# Altium PCB Flight_Controller.PcbDoc (part 2 of 4)
Units mil, origin at the board's own origin, x right, y up, seen from the top; angles counter-clockwise.
Board outline 2353.5 x 3084.1 mil, 4 copper layers (Top Layer, Layer 2, Layer 1, Bottom Layer), stack 62.48 mil thick; 95 components, 80 nets, 358 pads, 134 vias.
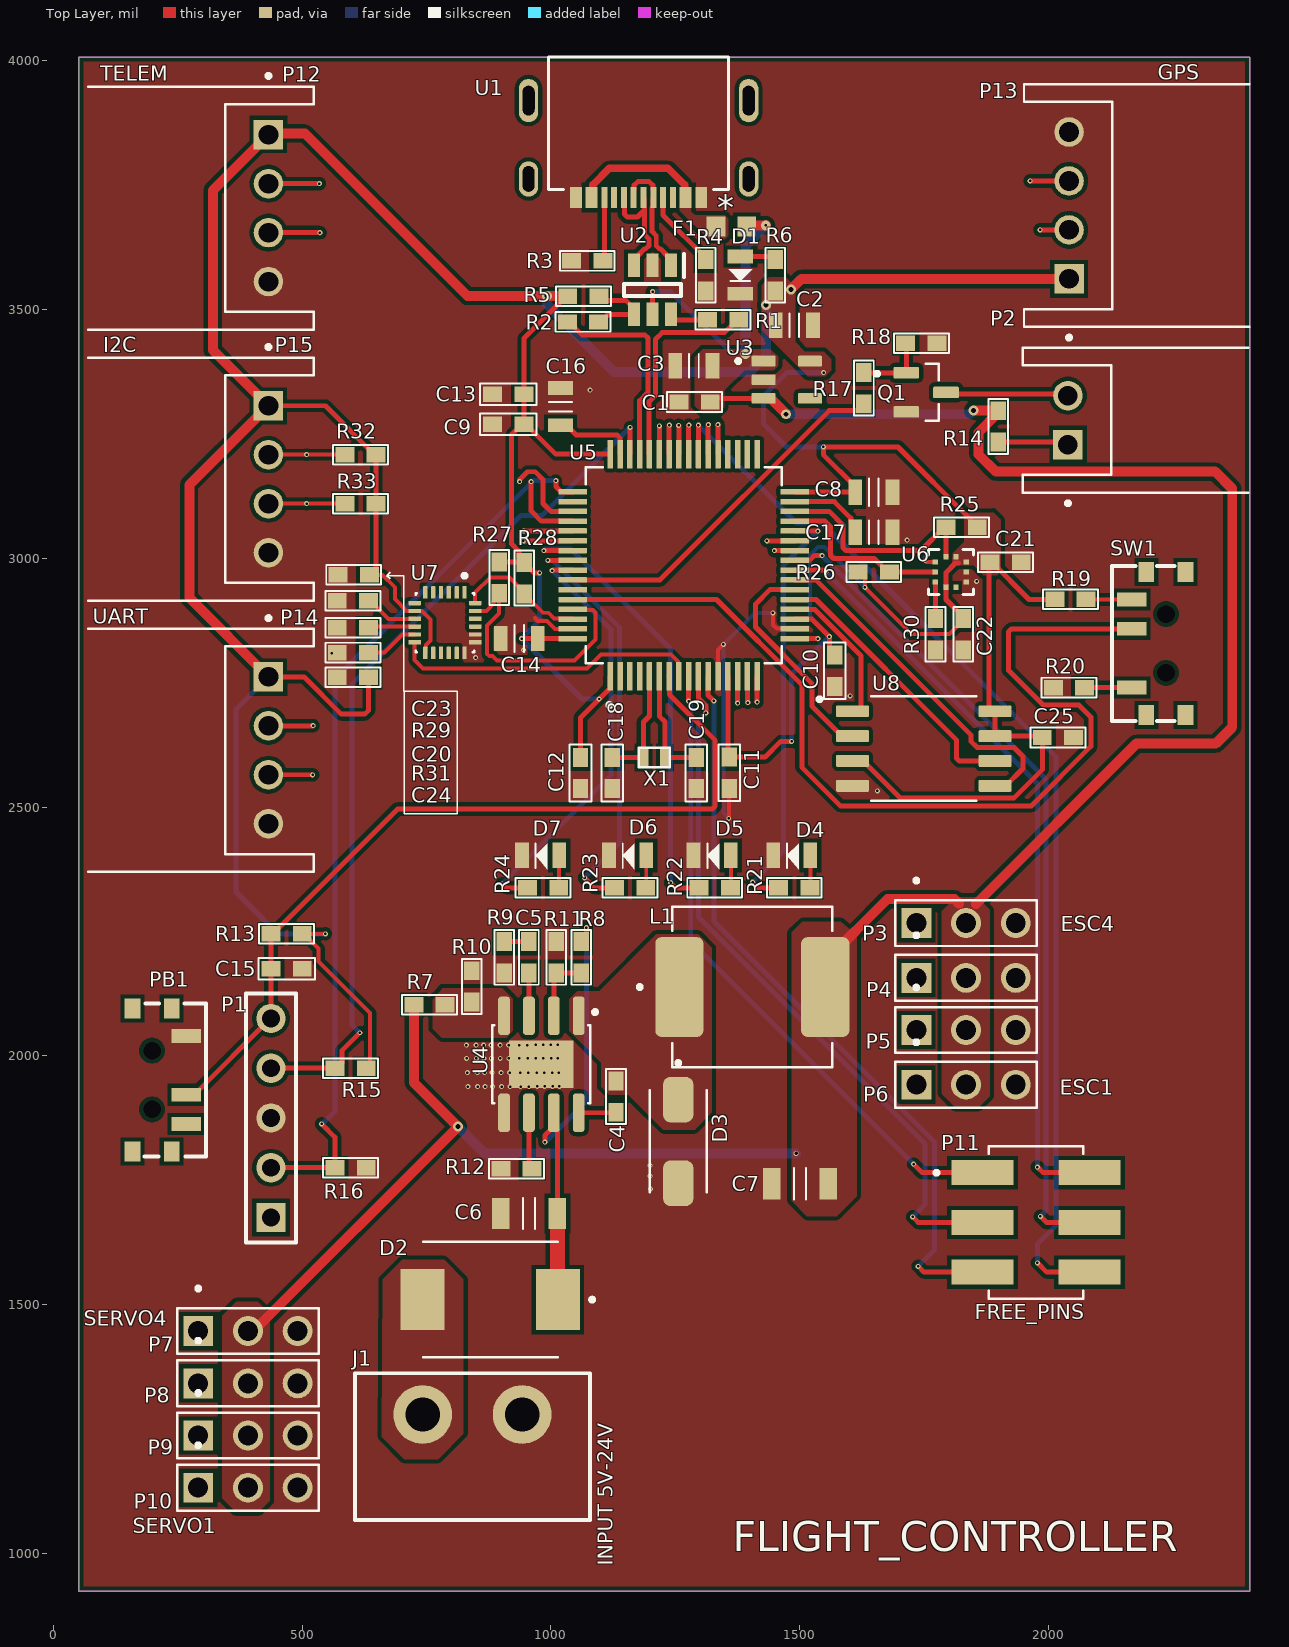
[diagram p0: Top Layer view]

## Part data (continued)
L1: "Inductor High Current Shielded Wirewound 15uH 20% 100KHz 4.9A 65.3mOhm DCR 3232 T/R", Case/Package=3232, Current Rating=4.9A, DC Resistance (DCR)=65.3mΩ, Manufacturer=Vishay, Manufacturer Part Number=IHLP3232DZER150M11, Max DC Current=3.7A, Max Operating Temperature=125°C, Min Operating Temperature=-55°C, Self Resonant Frequency=10.3MHz, Test Frequency=100kHz, Tolerance=20%, Inductance=15µH, Category="Fixed Inductors", China RoHS=Compliant, ComponentLink1Description=https://datasheet.octopart.com:443/IHLP3232DZER150M11-Vishay-datasheet-181468578.pdf?src-supplier=IHS, ComponentLink1URL=https://datasheet.octopart.com:443/IHLP3232DZER150M11-Vishay-datasheet-181468578.pdf?src-supplier=IHS, ComponentLink2Description=https://datasheet.octopart.com:443/IHLP3232DZER150M11-Vishay-datasheet-193387366.pdf?src-supplier=JRH+Electronics, ComponentLink2URL=https://datasheet.octopart.com:443/IHLP3232DZER150M11-Vishay-datasheet-193387366.pdf?src-supplier=JRH+Electronics, ComponentLink3Description=https://datasheet.octopart.com/IHLP3232DZER150M11-Vishay-datasheet-13133375.pdf, ComponentLink3URL=https://datasheet.octopart.com/IHLP3232DZER150M11-Vishay-datasheet-13133375.pdf, ComponentLink4Description=https://datasheet.octopart.com/IHLP3232DZER150M11-Vishay-datasheet-10981368.pdf, ComponentLink4URL=https://datasheet.octopart.com/IHLP3232DZER150M11-Vishay-datasheet-10981368.pdf, ComponentLink5Description=https://datasheet.octopart.com/IHLP3232DZER150M11-Vishay-datasheet-10855091.pdf, ComponentLink5URL=https://datasheet.octopart.com/IHLP3232DZER150M11-Vishay-datasheet-10855091.pdf, ComponentLink6Description=https://datasheet.octopart.com/IHLP3232DZER150M11-Vishay-datasheet-10854409.pdf, ComponentLink6URL=https://datasheet.octopart.com/IHLP3232DZER150M11-Vishay-datasheet-10854409.pdf, ComponentLink7Description=https://datasheet.octopart.com/IHLP3232DZER150M11-Vishay-datasheet-10673122.pdf, ComponentLink7URL=https://datasheet.octopart.com/IHLP3232DZER150M11-Vishay-datasheet-10673122.pdf, ComponentLink8Description=https://datasheet.octopart.com/IHLP3232DZER150M11-Vishay-datasheet-10546874.pdf, ComponentLink8URL=https://datasheet.octopart.com/IHLP3232DZER150M11-Vishay-datasheet-10546874.pdf, ComponentLink9Description=https://datasheet.octopart.com/IHLP3232DZER150M11-Vishay-datasheet-10406895.pdf, ComponentLink9URL=https://datasheet.octopart.com/IHLP3232DZER150M11-Vishay-datasheet-10406895.pdf, ComponentLink10Description=https://datasheet.octopart.com/IHLP3232DZER150M11-Vishay-datasheet-10293436.pdf, ComponentLink10URL=https://datasheet.octopart.com/IHLP3232DZER150M11-Vishay-datasheet-10293436.pdf, ComponentLink11Description=https://datasheet.octopart.com/IHLP3232DZER150M11-Vishay-datasheet-10187444.pdf, ComponentLink11URL=https://datasheet.octopart.com/IHLP3232DZER150M11-Vishay-datasheet-10187444.pdf, ComponentLink12Description=https://datasheet.octopart.com:443/IHLP3232DZER150M11-Vishay-datasheet-67039454.pdf?src-supplier=Farnell, ComponentLink12URL=https://datasheet.octopart.com:443/IHLP3232DZER150M11-Vishay-datasheet-67039454.pdf?src-supplier=Farnell, ComponentLink13Description=https://datasheet.octopart.com:443/IHLP3232DZER150M11-Vishay-datasheet-41195472.pdf?src-supplier=Newark, ComponentLink13URL=https://datasheet.octopart.com:443/IHLP3232DZER150M11-Vishay-datasheet-41195472.pdf?src-supplier=Newark, ComponentLink14Description=https://datasheet.octopart.com:443/IHLP3232DZER150M11-Vishay-datasheet-62320561.pdf?src-supplier=element14+APAC, ComponentLink14URL=https://datasheet.octopart.com:443/IHLP3232DZER150M11-Vishay-datasheet-62320561.pdf?src-supplier=element14+APAC, ComponentLink15Description=https://datasheet.octopart.com:443/IHLP3232DZER150M11-Vishay-Dale-datasheet-41169530.pdf?src-supplier=element14+APAC, ComponentLink15URL=https://datasheet.octopart.com:443/IHLP3232DZER150M11-Vishay-Dale-datasheet-41169530.pdf?src-supplier=element14+APAC, ComponentLink16Description=https://datasheet.octopart.com:443/IHLP3232DZER150M11-Vishay-datasheet-17023530.pdf?src-supplier=Factory+Futures, ComponentLink16URL=https://datasheet.octopart.com:443/IHLP3232DZER150M11-Vishay-datasheet-17023530.pdf?src-supplier=Factory+Futures, ComponentLink17Description=http://sigma.octopart.com:80/rohs_statement/Vishay-company-15.pdf?src-supplier=Compliance+Statements, ComponentLink17URL=http://sigma.octopart.com:80/rohs_statement/Vishay-company-15.pdf?src-supplier=Compliance+Statements, Composition=Wirewound, Contact Plating=Tin, Core Material=Composite, Depth=8.26mm, Height=4mm, Height - Seated (Max)=3.9878mm, Lead Free="Lead Free", Length=8.18mm, Lifecycle Status=Production, Max Current Rating=4.9A, Military Standard=Not, Mount="Surface Mount", Number of Circuits=1, Number of Pins=2, Number of Terminals=2, Pricing 1="1=1,08, 10=0,926, 50=0,808, 100=0,767, 200=0,728, 500=0,684 (EUR)", Radiation Hardening=No, REACH SVHC=Yes, Resistance=65.3mΩ, RMS Current (Irms)=4.9A, RoHS=Compliant, Saturation Current=3.7A, Schedule B="8504500000, 8504500000|8504500000|8504500000|8504500000|8504500000", Series Resistance=65.3mΩ, Shielding=Shielded, Stock 1=705, Supplier 1=Farnell, Supplier Part Number 1=IHLP3232DZER150M11, Termination=SMD/SMT, Width=8.18mm, Inductance Tolerance=20%
P1: "Header, 5-Pin", LatestRevisionDate=17-Jul-2002, LatestRevisionNote="Re-released for DXP Platform.", Publisher="Altium Limited"
P3 P4 P5 P6 P7 P8 P9 P10: "CONN HEADER VERT 3POS 2.54MM / Connector Header Through Hole 3 position 0.100\" (2.54mm)", Color=Black, Contact Current Rating=3A, Flammability Rating="UL94 V-0", High Temperature Housing=Yes, Manufacturer="TE Connectivity", Manufacturer Lifecycle Status=ACTIVE, Manufacturer Part Number=5-146281-3, Max Operating Temperature=105°C, Min Operating Temperature=-65°C, Ratings=CSA, Insulation Resistance=5GΩ, Approvals=CSA, Category="Headers and Wire Housings", China RoHS=Compliant, ComponentLink1Description=https://datasheet.octopart.com:443/5-146281-3-TE-Connectivity-datasheet-180097156.pdf?src-supplier=JRH+Electronics, ComponentLink1URL=https://datasheet.octopart.com:443/5-146281-3-TE-Connectivity-datasheet-180097156.pdf?src-supplier=JRH+Electronics, ComponentLink2Description=https://datasheet.octopart.com:443/5-146281-3-TE-Connectivity-datasheet-181434920.pdf?src-supplier=JRH+Electronics, ComponentLink2URL=https://datasheet.octopart.com:443/5-146281-3-TE-Connectivity-datasheet-181434920.pdf?src-supplier=JRH+Electronics, ComponentLink3Description=https://datasheet.octopart.com:443/5-146281-3-TE-Connectivity-datasheet-11894384.pdf?src-supplier=Electro+Sonic, ComponentLink3URL=https://datasheet.octopart.com:443/5-146281-3-TE-Connectivity-datasheet-11894384.pdf?src-supplier=Electro+Sonic, ComponentLink4Description=https://sigma.octopart.com:443/136685837/technical_drawing/TE-Connectivity-5-146281-3.pdf?src-supplier=Sager+Electronics, ComponentLink4URL=https://sigma.octopart.com:443/136685837/technical_drawing/TE-Connectivity-5-146281-3.pdf?src-supplier=Sager+Electronics, ComponentLink5Description=https://sigma.octopart.com:443/77883388/technical_drawing/TE-Connectivity-5-146281-3.pdf?src-supplier=TE+Connectivity, ComponentLink5URL=https://sigma.octopart.com:443/77883388/technical_drawing/TE-Connectivity-5-146281-3.pdf?src-supplier=TE+Connectivity, ComponentLink6Description=https://datasheet.octopart.com:443/5-146281-3-AMP-datasheet-176948369.pdf?src-supplier=Burklin+Elektronik, ComponentLink6URL=https://datasheet.octopart.com:443/5-146281-3-AMP-datasheet-176948369.pdf?src-supplier=Burklin+Elektronik, ComponentLink7Description=https://datasheet.octopart.com:443/5-146281-3-TE-Connectivity-datasheet-62113853.pdf?src-supplier=RS+(Formerly+Allied+Electronics), ComponentLink7URL=https://datasheet.octopart.com:443/5-146281-3-TE-Connectivity-datasheet-62113853.pdf?src-supplier=RS+(Formerly+Allied+Electronics), ComponentLink8Description=https://datasheet.octopart.com:443/5-146281-3-TE-Connectivity-datasheet-20738154.pdf?src-supplier=RS+(Formerly+Allied+Electronics), ComponentLink8URL=https://datasheet.octopart.com:443/5-146281-3-TE-Connectivity-datasheet-20738154.pdf?src-supplier=RS+(Formerly+Allied+Electronics), ComponentLink9Description=https://datasheet.octopart.com:443/5-146281-3-Tyco-Electronics-datasheet-9871387.pdf?src-supplier=RS+(Formerly+Allied+Electronics), ComponentLink9URL=https://datasheet.octopart.com:443/5-146281-3-Tyco-Electronics-datasheet-9871387.pdf?src-supplier=RS+(Formerly+Allied+Electronics), ComponentLink10Description=http://sigma.octopart.com:80/38847167/materials_sheet/TE-Connectivity-5-146281-3.pdf?src-supplier=Compliance+Statements, ComponentLink10URL=http://sigma.octopart.com:80/38847167/materials_sheet/TE-Connectivity-5-146281-3.pdf?src-supplier=Compliance+Statements, ComponentLink11Description=http://sigma.octopart.com:80/78323269/materials_sheet/TE-Connectivity-5-146281-3.pdf?src-supplier=Compliance+Statements, ComponentLink11URL=http://sigma.octopart.com:80/78323269/materials_sheet/TE-Connectivity-5-146281-3.pdf?src-supplier=Compliance+Statements, ComponentLink12Description=http://sigma.octopart.com:80/136743184/materials_sheet/TE-Connectivity-5-146281-3.pdf?src-supplier=Compliance+Statements, ComponentLink12URL=http://sigma.octopart.com:80/136743184/materials_sheet/TE-Connectivity-5-146281-3.pdf?src-supplier=Compliance+Statements, ComponentLink13Description=http://sigma.octopart.com:80/14915290/rohs_certificate/Agastat-5-146281-3.pdf?src-supplier=Compliance+Statements, ComponentLink13URL=http://sigma.octopart.com:80/14915290/rohs_certificate/Agastat-5-146281-3.pdf?src-supplier=Compliance+Statements, Connector Type="Header, Pin, Plug", Contact Gender=Male, Contact Mating Length=5.842mm, Contact Plating=Gold, Contact Shape=Square, Contact Style=Pin, Current Rating=3A, Depth=2.34mm, ELV=Compliant, Export Control Classification Number (ECCN) Code=EAR99, Gender=Male, Harmonized Tariff Schedule (HTS) Code=8536.69.40.40, High Speed Serial Data Connector=No, Housing Color=Black, Housing Material=Polymer, Keyed=No, Lead Free="Lead Free", Lead Length=3.048mm, Length=7.21mm, Lifecycle Status=Production, Mating Post Length=5.842mm, Mount="Through Hole", Number of Contacts=3, Number of Pins=3, Number of Ports=1, Number of Positions=3, Number of Rows=1, Orientation=Vertical, Packaging=Carton, PCB Mounting Orientation=Vertical, PCB Thickness=1.6002mm, Pitch=2.54mm, Plating Thickness=762nm, Pricing 1="10=0,602, 50=0,55, 100=0,462, 250=0,419 (EUR)", Radiation Hardening=No, REACH SVHC=Yes, RoHS=Compliant, Row Spacing=2.54mm, Shielding=Unshielded, Stock 1=263, Supplier 1=Farnell, Supplier Part Number 1=5-146281-3, Terminal Pitch=2.54mm, Termination=Solder, Insulation Color=Black, Introduction Date=2005-06-13
P11: "6pin 2.54mm 2 2.54mm Header，Push-Pull 3A 2.54μm tin SMD mount 7.78mm(Length)*7.37mm(height)", Current Rating=3A, Dielectric Material=Polyethylene, Manufacturer="Amphenol Communications Solutions", Manufacturer Part Number=10125394-T0803ALF, Max Operating Temperature=125°C, Min Operating Temperature=-65°C, Supplier Part Number 1=649-10125394T0803ALF, Insulation Color=Black, Insulation Resistance=5GΩ, Category="Card Edge Connectors", ComponentLink1Description=https://datasheet.octopart.com:443/10125394-T0803ALF-Amphenol-Communications-Solutions-datasheet-182239538.pdf?src-supplier=IHS, ComponentLink1URL=https://datasheet.octopart.com:443/10125394-T0803ALF-Amphenol-Communications-Solutions-datasheet-182239538.pdf?src-supplier=IHS, Gender=Male, Lifecycle Status=Production, Number of Positions=6, Number of Rows=2, Orientation=Straight, Pitch=2.54mm, Plating Thickness=2.54µm, Pricing 1="1=0,55, 10=0,47, 50=0,47, 100=0,383, 1000=0,325, 10000=0,305 (USD)", REACH SVHC=Yes, RoHS=Compliant, Row Spacing=5.46mm, Stock 1=1906, Supplier 1=Mouser, Terminal Pitch=2.54mm
P12 P13 P14 P15: "Header, Right Angle, 4Way;", Contact Resistance=20mΩ, Current Rating=3A, Housing Color=White, Manufacturer=JST, Manufacturer Part Number=S4B-XH-A(LF)(SN), Max Operating Temperature=85°C, Max Voltage Rating (AC)=250V, Min Operating Temperature=-25°C, Ratings=TUV, Supplier Part Number 1="S4B-XH-A (LF)(SN)", Insulation Resistance=1GΩ, Category="Headers and Wire Housings", China RoHS=Compliant, ComponentLink1Description=https://datasheet.octopart.com:443/S4B-XH-A%28LF%29%28SN%29-JST-datasheet-12510042.pdf?src-supplier=Upverter, ComponentLink1URL=https://datasheet.octopart.com:443/S4B-XH-A%28LF%29%28SN%29-JST-datasheet-12510042.pdf?src-supplier=Upverter, ComponentLink2Description=https://datasheet.octopart.com:443/S4B-XH-A%28LF%29%28SN%29-JST-datasheet-8325564.pdf?src-supplier=Burklin+Elektronik, ComponentLink2URL=https://datasheet.octopart.com:443/S4B-XH-A%28LF%29%28SN%29-JST-datasheet-8325564.pdf?src-supplier=Burklin+Elektronik, ComponentLink3Description=https://datasheet.octopart.com:443/S4B-XH-A%28LF%29%28SN%29-JST-datasheet-138896056.pdf?src-supplier=IHS, ComponentLink3URL=https://datasheet.octopart.com:443/S4B-XH-A%28LF%29%28SN%29-JST-datasheet-138896056.pdf?src-supplier=IHS, ComponentLink4Description=https://datasheet.octopart.com:443/S4B-XH-A-%28LF%29%28SN%29-JST-datasheet-62336360.pdf?src-supplier=element14+APAC, ComponentLink4URL=https://datasheet.octopart.com:443/S4B-XH-A-%28LF%29%28SN%29-JST-datasheet-62336360.pdf?src-supplier=element14+APAC, ComponentLink5Description=https://datasheet.octopart.com:443/S4B-XH-A-%28LF%29%28SN%29-JST-datasheet-63094.pdf?src-supplier=element14+APAC, ComponentLink5URL=https://datasheet.octopart.com:443/S4B-XH-A-%28LF%29%28SN%29-JST-datasheet-63094.pdf?src-supplier=element14+APAC, ComponentLink6Description=https://datasheet.octopart.com:443/S4B-XH-A%28LF%29%28SN%29-JST-datasheet-140264791.pdf?src-supplier=LKR, ComponentLink6URL=https://datasheet.octopart.com:443/S4B-XH-A%28LF%29%28SN%29-JST-datasheet-140264791.pdf?src-supplier=LKR, Connector Type="Male Pin", Contact Material=Brass, Contact Plating=Tin, Country of Origin=Japan, Depth=11.5mm, Export Control Classification Number (ECCN) Code=EAR99, Gender=Male, Harmonized Tariff Schedule (HTS) Code=8536.69.40.40, Height=6.1mm, Housing Material=Polyamide, Lead Free="Lead Free", Lead Pitch=2.5mm, Length=12.4mm, Lifecycle Status=Production, Max Current Rating=3A, Mount="Through Hole", Number of Contacts=4, Number of Pins=4, Number of Poles=4, Number of Positions=4, Number of Rows=1, Orientation="Right Angle", Pitch=2.4892mm, Pricing 1="100=0,172, 500=0,149, 1000=0,142, 2500=0,139 (EUR)", REACH SVHC=No, RoHS=Compliant, Stock 1=59807, Supplier 1=Farnell, Terminal Pitch=2.5mm, Termination=Solder, Voltage Rating=250V, Voltage Rating (AC)=250V, Weight=28.349523g, Width=11.5mm, Wire/Cable Gauge=22AWG, Insulation Color=White, Introduction Date=2005-10-20
PB1: "Slide Switch, SPDT, 0.025A, 24V, SMD", Manufacturer=E-Switch, Max Operating Temperature=70°C, Min Operating Temperature=-20°C, Operating Force=150gf, Supplier Part Number 1=EG5720CT-ND, Voltage Rating (DC)=24V, Actuator Length=1.4mm, Actuator Type=Standard, ComponentLink1Description=https://media.digikey.com/pdf/Data%20Sheets/E-Switch%20PDFs/EG1215_Series_Ds.pdf?src-supplier=Digikey, ComponentLink1URL=https://media.digikey.com/pdf/Data%20Sheets/E-Switch%20PDFs/EG1215_Series_Ds.pdf?src-supplier=Digikey, ComponentLink2Description=http://www.farnell.com/datasheets/2645007.pdf?src-supplier=Farnell, ComponentLink2URL=http://www.farnell.com/datasheets/2645007.pdf?src-supplier=Farnell, Electrical Life=10000Cycles, Manufacturer Part Number=EG1215AA, Mechanical Life=10000Cycles, Mount="Surface Mount", Packaging="Cut Tape", Pricing 1="1=0,99, 10=0,951, 25=0,8884, 100=0,7715, 250=0,702, 500=0,6508, 1000=0,60327 (USD)", RoHS=Yes, RoHS Compliant=Yes, Series=EG, Stock 1=15837, Supplier 1=Digikey, Switch Function=On-On, Switch Travel=1.5mm, Termination="Gull Wing", Throw Configuration=SPDT
R1 R2 R3 R4 R13 R15 R16 R19 R20 R25 R26 R27 R28 R29 R30 R31 R32 R33: library part "RES 10K OHM 0603", "RES 10K %1 OHM 0603 SMD", Case Code (Metric)=1608, Case Code (Imperial)=0603, Manufacturer=Yageo, Max Operating Temperature=155°C, Max Power Dissipation=100mW, Min Operating Temperature=-55°C, Resistance=10kR, Resistance Tolerance=1%, Resistor Type="Thick Film", Supplier Part Number 1=311-10.0KHRCT-ND, Temperature Coefficient=100ppm/°C, Voltage Rating=75V, Voltage Rating (DC)=50V, Case/Package=0603, Category="Chip SMD Resistors", ComponentLink1Description=https://datasheet.ciiva.com/7660/38590-7660789.pdf?src-supplier=Element14, ComponentLink1URL=https://datasheet.ciiva.com/7660/38590-7660789.pdf?src-supplier=Element14, ComponentLink2Description=https://datasheet.ciiva.com/15189/getdatasheetpartid-409289-15189591.pdf?src-supplier=Verical, ComponentLink2URL=https://datasheet.ciiva.com/15189/getdatasheetpartid-409289-15189591.pdf?src-supplier=Verical, ComponentLink3Description=https://datasheet.ciiva.com/46440/1868787-46440891.pdf?src-supplier=Element14, ComponentLink3URL=https://datasheet.ciiva.com/46440/1868787-46440891.pdf?src-supplier=Element14, ComponentLink4Description=https://datasheet.ciiva.com/7983/443971-7983596.pdf?src-supplier=Element14, ComponentLink4URL=https://datasheet.ciiva.com/7983/443971-7983596.pdf?src-supplier=Element14, ComponentLink5Description=https://datasheet.ciiva.com/7746/1738695-7746239.pdf?src-supplier=Element14, ComponentLink5URL=https://datasheet.ciiva.com/7746/1738695-7746239.pdf?src-supplier=Element14, ComponentLink6Description=https://datasheet.ciiva.com/22747/443971-22747519.pdf?src-supplier=Element14, ComponentLink6URL=https://datasheet.ciiva.com/22747/443971-22747519.pdf?src-supplier=Element14, Construction=Rectangular, Depth=0.8mm, Designed by=BERK, Features="Moisture Resistant", Height=0.45mm, Lead Free="Lead Free", Lead Pitch=0.3mm, Length=1.6mm, Manufacturer Part Number=RC0603FR-0710KL, Military Standard=Not, Number of Pins=2, Number of Terminations=2, Packaging="Tape and Reel", Power Rating=100mW, Pricing 1="1=0,10000, 10=0,02300, 100=0,00930, 1000=0,00417, 2500=0,00362 (USD)", REACH SVHC=Unknown, RoHS=Yes, RoHS Compliant=Yes, Series=RC, Size Code=0603, Stock 1=24140601, Supplier 1=Digi-Key, Termination=SMD/SMT, Tolerance=1%, Weight=7.1E-05oz, Width=0.8mm
R5 R6 R21 R22 R23 R24: library part "RES 1K OHM 0603", "RES 1K %1 OHM 0603 SMD", Case Code (Metric)=1608, Case Code (Imperial)=0603, Manufacturer=Yageo, Manufacturer Part Number=RC0603JR-071KL, Max Operating Temperature=155°C, Min Operating Temperature=-55°C, Package Quantity=5000, Power Rating=100mW, Resistance=1kR, Resistance Tolerance=5%, Resistor Type="Thick Film", Supplier Part Number 1=311-1.0KGRCT-ND, Temperature Coefficient=100ppm/°C, Voltage Rating=50V, Body Length=1.6mm, Case/Package=0603, Category="Chip SMD Resistors", ComponentLink1Description=https://datasheet.ciiva.com/8883/pyu-rc0603-51-rohs-l-4-8883051.pdf?src-supplier=Avnet, ComponentLink1URL=https://datasheet.ciiva.com/8883/pyu-rc0603-51-rohs-l-4-8883051.pdf?src-supplier=Avnet, ComponentLink2Description=https://datasheet.ciiva.com/7746/443971-7746461.pdf?src-supplier=Element14, ComponentLink2URL=https://datasheet.ciiva.com/7746/443971-7746461.pdf?src-supplier=Element14, ComponentLink3Description=https://datasheet.ciiva.com/22747/443971-22747533.pdf?src-supplier=Element14, ComponentLink3URL=https://datasheet.ciiva.com/22747/443971-22747533.pdf?src-supplier=Element14, ComponentLink4Description=https://datasheet.ciiva.com/7746/443971-7746462.pdf?src-supplier=Element14, ComponentLink4URL=https://datasheet.ciiva.com/7746/443971-7746462.pdf?src-supplier=Element14, Construction=Rectangular, Contact Plating=Tin,Matte, Depth=0.8mm, Designed by=BERK, Height=0.45mm, Lead Free="Lead Free", Length=1.6mm, Military Standard=Not, Number of Pins=2, Packaging="Tape and Reel", Pricing 1="1=0,10000, 10=0,01900, 100=0,00770, 1000=0,00344, 2500=0,00298 (USD)", Radiation Hardening=No, REACH SVHC=Unknown, RoHS=Yes, RoHS Compliant=Yes, Series=RC, Size Code=0603, Stock 1=5112056, Supplier 1=Digi-Key, Termination=SMD/SMT, Tolerance=5%, Voltage Rating (DC)=50V, Width=0.8mm
R7 R8 R9 R10 R12: library part "RES 220K OHM 0603", "RES 220K %5 OHM 0603 SMD", Case Code (Metric)=1608, Case Code (Imperial)=0603, Manufacturer=Yageo, Max Operating Temperature=155°C, Max Power Dissipation=100mW, Min Operating Temperature=-55°C, Package Quantity=1, Resistance=220kR, Resistance Tolerance=5%, Resistor Type="Thick Film", Supplier Part Number 1=311-220KGRCT-ND, Temperature Coefficient=100ppm/°C, Voltage Rating=50V, Case/Package=0603, Category="Chip SMD Resistors", ComponentLink1Description=https://datasheet.ciiva.com/2452/pyu-r-int-thick-7-2452923.pdf?src-supplier=Digi-Key, ComponentLink1URL=https://datasheet.ciiva.com/2452/pyu-r-int-thick-7-2452923.pdf?src-supplier=Digi-Key, ComponentLink2Description=https://datasheet.ciiva.com/2452/pyu-r-int-thick-7-2452924.pdf?src-supplier=Digi-Key, ComponentLink2URL=https://datasheet.ciiva.com/2452/pyu-r-int-thick-7-2452924.pdf?src-supplier=Digi-Key, ComponentLink3Description=https://datasheet.ciiva.com/2452/pyu-r-int-thick-7-2452925.pdf?src-supplier=Digi-Key, ComponentLink3URL=https://datasheet.ciiva.com/2452/pyu-r-int-thick-7-2452925.pdf?src-supplier=Digi-Key, Construction=Rectangular, Deisgned by=BERK, Depth=0.8mm, Features="Moisture Resistant", Height=0.022inch, Lead Free="Lead Free", Length=1.6mm, Manufacturer Part Number=RC0603JR-07220KL, Military Standard=Not, Number of Pins=2, Number of Terminations=2, Packaging="Tape and Reel", Power Rating=100mW, Pricing 1="1=0,10000, 10=0,01900, 100=0,00770, 1000=0,00344, 2500=0,00298 (USD)", REACH SVHC="No SVHC", RoHS=Yes, RoHS Compliant=Yes, Series=RC, Size Code=0603, Stock 1=558053, Supplier 1=Digi-Key, Termination=SMD/SMT, Tolerance=5%, Voltage Rating (DC)=50V, Width=0.031inch
R11: library part "RES 43K OHM 0603", "RES 43K %5 OHM 0603 SMD", Case Code (Metric)=1608, Case Code (Imperial)=0603, Manufacturer=Yageo, Max Operating Temperature=155°C, Max Power Dissipation=100mW, Min Operating Temperature=-55°C, Package Quantity=1, Resistance=43kR, Resistor Type="Thick Film", Supplier Part Number 1=311-43KGRCT-ND, Temperature Coefficient=100ppm/°C, Tolerance=5%, Voltage Rating=75V, Voltage Rating (DC)=50V, Case/Package=0603, Category="Chip SMD Resistors", ComponentLink1Description=https://datasheet.ciiva.com/2453/pyu-r-int-thick-7-2453052.pdf?src-supplier=Digi-Key, ComponentLink1URL=https://datasheet.ciiva.com/2453/pyu-r-int-thick-7-2453052.pdf?src-supplier=Digi-Key, ComponentLink2Description=https://datasheet.ciiva.com/2453/pyu-r-int-thick-7-2453053.pdf?src-supplier=Digi-Key, ComponentLink2URL=https://datasheet.ciiva.com/2453/pyu-r-int-thick-7-2453053.pdf?src-supplier=Digi-Key, ComponentLink3Description=https://datasheet.ciiva.com/2453/pyu-r-int-thick-7-2453054.pdf?src-supplier=Digi-Key, ComponentLink3URL=https://datasheet.ciiva.com/2453/pyu-r-int-thick-7-2453054.pdf?src-supplier=Digi-Key, Construction=Rectangular, Depth=0.8mm, Designed by=BERK, Features="Moisture Resistant", Height=0.022inch, Lead Free="Lead Free", Length=1.6mm, Manufacturer Part Number=RC0603JR-0743KL, Military Standard=Not, Number of Terminations=2, Packaging="Tape and Reel", Power Rating=100mW, Pricing 1="1=0,10000, 10=0,01900, 100=0,00770, 1000=0,00344, 2500=0,00298 (USD)", RoHS=Yes, RoHS Compliant=Yes, Series=RC, Stock 1=127716, Supplier 1=Digi-Key, Technology="THICK FILM", Termination=SMD/SMT, Weight=7.1E-05oz, Width=0.8mm, Working Voltage=75V
R14: library part "RES 15 OHM 0603", "RES 15 %5 OHM 0603 SMD", Case Code (Metric)=1608, Case Code (Imperial)=0603, Manufacturer=Yageo, Max Operating Temperature=155°C, Max Power Dissipation=100mW, Min Operating Temperature=-55°C, Package Quantity=1, Resistance=33R, Resistance Tolerance=5%, Resistor Type="Thick Film", Supplier Part Number 1=311-15GRCT-ND, Temperature Coefficient=100ppm/°C, Voltage Rating=75V, Voltage Rating (DC)=50V, Case/Package=0603, Category="Chip SMD Resistors", ComponentLink1Description=https://datasheet.ciiva.com/2453/pyu-r-int-thick-7-2453085.pdf?src-supplier=Digi-Key, ComponentLink1URL=https://datasheet.ciiva.com/2453/pyu-r-int-thick-7-2453085.pdf?src-supplier=Digi-Key, ComponentLink2Description=https://datasheet.ciiva.com/7746/443971-7746445.pdf?src-supplier=Element14, ComponentLink2URL=https://datasheet.ciiva.com/7746/443971-7746445.pdf?src-supplier=Element14, ComponentLink3Description=https://datasheet.ciiva.com/2453/pyu-r-int-thick-7-2453086.pdf?src-supplier=Digi-Key, ComponentLink3URL=https://datasheet.ciiva.com/2453/pyu-r-int-thick-7-2453086.pdf?src-supplier=Digi-Key, ComponentLink4Description=https://datasheet.ciiva.com/7746/443971-7746446.pdf?src-supplier=Element14, ComponentLink4URL=https://datasheet.ciiva.com/7746/443971-7746446.pdf?src-supplier=Element14, ComponentLink5Description=https://datasheet.ciiva.com/2453/pyu-r-int-thick-7-2453087.pdf?src-supplier=Digi-Key, ComponentLink5URL=https://datasheet.ciiva.com/2453/pyu-r-int-thick-7-2453087.pdf?src-supplier=Digi-Key, Construction=Rectangular, Depth=0.8mm, Designed by=BERK, Features="Moisture Resistant", Height=0.022inch, Lead Free="Lead Free", Length=1.6mm, Manufacturer Part Number=RC0603JR-0715RL, Military Standard=Not, Number of Pins=2, Number of Terminations=2, Packaging="Tape and Reel", Power Rating=100mW, Pricing 1="1=0,10000, 10=0,01900, 100=0,00770, 1000=0,00344, 2500=0,00298 (USD)", REACH SVHC="No SVHC", RoHS=Yes, RoHS Compliant=Yes, Series=RC, Stock 1=1720, Supplier 1=Digi-Key, Termination=SMD/SMT, Tolerance=5%, Weight=7.1E-05oz, Width=0.8mm, Working Voltage=75V
R17: library part "RES 10K OHM 0603", "RES 10K %1 OHM 0603 SMD", Case Code (Metric)=1608, Case Code (Imperial)=0603, Manufacturer=Yageo, Max Operating Temperature=155°C, Max Power Dissipation=100mW, Min Operating Temperature=-55°C, Resistance=470R, Resistance Tolerance=1%, Resistor Type="Thick Film", Supplier Part Number 1=311-10.0KHRCT-ND, Temperature Coefficient=100ppm/°C, Voltage Rating=75V, Voltage Rating (DC)=50V, Case/Package=0603, Category="Chip SMD Resistors", ComponentLink1Description=https://datasheet.ciiva.com/7660/38590-7660789.pdf?src-supplier=Element14, ComponentLink1URL=https://datasheet.ciiva.com/7660/38590-7660789.pdf?src-supplier=Element14, ComponentLink2Description=https://datasheet.ciiva.com/15189/getdatasheetpartid-409289-15189591.pdf?src-supplier=Verical, ComponentLink2URL=https://datasheet.ciiva.com/15189/getdatasheetpartid-409289-15189591.pdf?src-supplier=Verical, ComponentLink3Description=https://datasheet.ciiva.com/46440/1868787-46440891.pdf?src-supplier=Element14, ComponentLink3URL=https://datasheet.ciiva.com/46440/1868787-46440891.pdf?src-supplier=Element14, ComponentLink4Description=https://datasheet.ciiva.com/7983/443971-7983596.pdf?src-supplier=Element14, ComponentLink4URL=https://datasheet.ciiva.com/7983/443971-7983596.pdf?src-supplier=Element14, ComponentLink5Description=https://datasheet.ciiva.com/7746/1738695-7746239.pdf?src-supplier=Element14, ComponentLink5URL=https://datasheet.ciiva.com/7746/1738695-7746239.pdf?src-supplier=Element14, ComponentLink6Description=https://datasheet.ciiva.com/22747/443971-22747519.pdf?src-supplier=Element14, ComponentLink6URL=https://datasheet.ciiva.com/22747/443971-22747519.pdf?src-supplier=Element14, Construction=Rectangular, Depth=0.8mm, Designed by=BERK, Features="Moisture Resistant", Height=0.45mm, Lead Free="Lead Free", Lead Pitch=0.3mm, Length=1.6mm, Manufacturer Part Number=RC0603FR-0710KL, Military Standard=Not, Number of Pins=2, Number of Terminations=2, Packaging="Tape and Reel", Power Rating=100mW, Pricing 1="1=0,10000, 10=0,02300, 100=0,00930, 1000=0,00417, 2500=0,00362 (USD)", REACH SVHC=Unknown, RoHS=Yes, RoHS Compliant=Yes, Series=RC, Size Code=0603, Stock 1=24140601, Supplier 1=Digi-Key, Termination=SMD/SMT, Tolerance=1%, Weight=7.1E-05oz, Width=0.8mm
R18: library part "RES 10K OHM 0603", "RES 10K %1 OHM 0603 SMD", Case Code (Metric)=1608, Case Code (Imperial)=0603, Manufacturer=Yageo, Max Operating Temperature=155°C, Max Power Dissipation=100mW, Min Operating Temperature=-55°C, Resistance=22kR, Resistance Tolerance=1%, Resistor Type="Thick Film", Supplier Part Number 1=311-10.0KHRCT-ND, Temperature Coefficient=100ppm/°C, Voltage Rating=75V, Voltage Rating (DC)=50V, Case/Package=0603, Category="Chip SMD Resistors", ComponentLink1Description=https://datasheet.ciiva.com/7660/38590-7660789.pdf?src-supplier=Element14, ComponentLink1URL=https://datasheet.ciiva.com/7660/38590-7660789.pdf?src-supplier=Element14, ComponentLink2Description=https://datasheet.ciiva.com/15189/getdatasheetpartid-409289-15189591.pdf?src-supplier=Verical, ComponentLink2URL=https://datasheet.ciiva.com/15189/getdatasheetpartid-409289-15189591.pdf?src-supplier=Verical, ComponentLink3Description=https://datasheet.ciiva.com/46440/1868787-46440891.pdf?src-supplier=Element14, ComponentLink3URL=https://datasheet.ciiva.com/46440/1868787-46440891.pdf?src-supplier=Element14, ComponentLink4Description=https://datasheet.ciiva.com/7983/443971-7983596.pdf?src-supplier=Element14, ComponentLink4URL=https://datasheet.ciiva.com/7983/443971-7983596.pdf?src-supplier=Element14, ComponentLink5Description=https://datasheet.ciiva.com/7746/1738695-7746239.pdf?src-supplier=Element14, ComponentLink5URL=https://datasheet.ciiva.com/7746/1738695-7746239.pdf?src-supplier=Element14, ComponentLink6Description=https://datasheet.ciiva.com/22747/443971-22747519.pdf?src-supplier=Element14, ComponentLink6URL=https://datasheet.ciiva.com/22747/443971-22747519.pdf?src-supplier=Element14, Construction=Rectangular, Depth=0.8mm, Designed by=BERK, Features="Moisture Resistant", Height=0.45mm, Lead Free="Lead Free", Lead Pitch=0.3mm, Length=1.6mm, Manufacturer Part Number=RC0603FR-0710KL, Military Standard=Not, Number of Pins=2, Number of Terminations=2, Packaging="Tape and Reel", Power Rating=100mW, Pricing 1="1=0,10000, 10=0,02300, 100=0,00930, 1000=0,00417, 2500=0,00362 (USD)", REACH SVHC=Unknown, RoHS=Yes, RoHS Compliant=Yes, Series=RC, Size Code=0603, Stock 1=24140601, Supplier 1=Digi-Key, Termination=SMD/SMT, Tolerance=1%, Weight=7.1E-05oz, Width=0.8mm
SW1: "Slide Switch, SPDT, 0.025A, 24V, SMD", Case/Package=Axial, Current Rating=25mA, Manufacturer=E-Switch, Max Operating Temperature=175°C, Max Power Dissipation=5W, Min Operating Temperature=-20°C, Operating Force=150gf, Supplier Part Number 1=EG5720CT-ND, Tolerance=4.95%, Voltage Rating (DC)=24V, Zener Voltage=9.1V, Actuator Length=1.4mm, Actuator Type=Standard, ComponentLink1Description=https://media.digikey.com/pdf/Data%20Sheets/E-Switch%20PDFs/EG1215_Series_Ds.pdf?src-supplier=Digi-Key, ComponentLink1URL=https://media.digikey.com/pdf/Data%20Sheets/E-Switch%20PDFs/EG1215_Series_Ds.pdf?src-supplier=Digi-Key, ComponentLink2Description=http://www.farnell.com/datasheets/2645007.pdf?src-supplier=Farnell, ComponentLink2URL=http://www.farnell.com/datasheets/2645007.pdf?src-supplier=Farnell, Designed by=BERK, Electrical Life=10000Cycles, Manufacturer Part Number=EG1215AA, Mechanical Life=10000Cycles, Mount="Surface Mount,Through Hole", Packaging="Cut Tape", Pricing 1="1=0,85000, 10=0,81900, 25=0,76560, 100=0,66470, 250=0,60480, 500=0,56070, 1000=0,51975 (USD)", RoHS=No, Stock 1=6245, Supplier 1=Digi-Key, Switch Function=On-On, Switch Travel=1.5mm, Termination="Gull Wing", Throw Configuration=SPDT, Impedance=2R
U1: "USB Connector, 16 Contact(s), Female, Right Angle, Surface Mount Terminal, Locking, Receptacle", Contact Resistance=20mΩ, Current Rating=1.25A, Manufacturer=Molex, Manufacturer Part Number=216990-0002, Max Operating Temperature=85°C, Min Operating Temperature=-40°C, Voltage Rating=30V, Insulation Color=Black, Insulation Resistance=100MΩ, Category="USB Connectors", China RoHS=Compliant, ComponentLink1Description=https://datasheet.octopart.com:443/216990-0002-Molex-datasheet-158830327.pdf?src-supplier=Upverter, ComponentLink1URL=https://datasheet.octopart.com:443/216990-0002-Molex-datasheet-158830327.pdf?src-supplier=Upverter, ComponentLink2Description=https://sigma.octopart.com:443/158830328/technical_drawing/Molex-216990-0002.pdf?src-supplier=Upverter, ComponentLink2URL=https://sigma.octopart.com:443/158830328/technical_drawing/Molex-216990-0002.pdf?src-supplier=Upverter, ComponentLink3Description=https://datasheet.octopart.com:443/216990-0002-Molex-datasheet-193080748.pdf?src-supplier=JRH+Electronics, ComponentLink3URL=https://datasheet.octopart.com:443/216990-0002-Molex-datasheet-193080748.pdf?src-supplier=JRH+Electronics, ComponentLink4Description=https://datasheet.octopart.com:443/216990-0002-Molex-datasheet-164573281.pdf?src-supplier=RS+(Formerly+Allied+Electronics), ComponentLink4URL=https://datasheet.octopart.com:443/216990-0002-Molex-datasheet-164573281.pdf?src-supplier=RS+(Formerly+Allied+Electronics), ComponentLink5Description=http://sigma.octopart.com:80/reach_statement/Molex-company-74.pdf?src-supplier=Compliance+Statements, ComponentLink5URL=http://sigma.octopart.com:80/reach_statement/Molex-company-74.pdf?src-supplier=Compliance+Statements, ComponentLink6Description=http://sigma.octopart.com:80/rohs_statement/Molex-company-73.pdf?src-supplier=Compliance+Statements, ComponentLink6URL=http://sigma.octopart.com:80/rohs_statement/Molex-company-73.pdf?src-supplier=Compliance+Statements, ComponentLink7Description=http://sigma.octopart.com:80/conflict_mineral_statement/Molex-company-72.pdf?src-supplier=Compliance+Statements, ComponentLink7URL=http://sigma.octopart.com:80/conflict_mineral_statement/Molex-company-72.pdf?src-supplier=Compliance+Statements, Contact Material="Gold, Nickel", Country of Origin="Mainland China", Export Control Classification Number (ECCN) Code=EAR99, Gender=Female, Harmonized Tariff Schedule (HTS) Code=8536.69.40.30, Lifecycle Status=Production, Number of Contacts=16, Number of Pins=16, Number of Ports=1, Number of Positions=16, Number of Rows=1, Orientation="Right Angle", Pricing 1="1=0,825, 35=0,567, 105=0,519, 280=0,488 (EUR)", REACH SVHC=Yes, RoHS=Compliant, Shell Finish=Nickel, Shell Material="Stainless Steel", Stock 1=5017, Supplier 1=Farnell, Supplier Part Number 1=216990-0002, Terminal Pitch=500µm, USB Standard="USB 2.0", Introduction Date=2021-08-25
U2: "USBLC6 Series 2 Line 6 V Uni / Bi Directional ESD Protection - SOT-23-6", Breakdown Voltage=6V, Capacitance=2.5pF, Case/Package=SOT-23-6, Clamping Voltage=17V, Forward Voltage=860mV, Leakage Current=150nA, Manufacturer=STMicroelectronics, Manufacturer Part Number=USBLC6-2SC6Y, Max Junction Temperature (Tj)=150°C, Min Operating Temperature=-40°C, Operating Supply Voltage=1.1V, Peak Pulse Current=5A, Power Line Protection=Yes, Ratings=AEC-Q101, Reverse Standoff Voltage=5.25V, Series Resistance=330Ω, Test Current=1mA, Category="TVS Diodes", China RoHS=Compliant, ComponentLink1Description=https://datasheet.octopart.com:443/USBLC6-2SC6Y-STMicroelectronics-datasheet-12533815.pdf?src-supplier=ODG+(Origin+Data+Global), ComponentLink1URL=https://datasheet.octopart.com:443/USBLC6-2SC6Y-STMicroelectronics-datasheet-12533815.pdf?src-supplier=ODG+(Origin+Data+Global), ComponentLink2Description=https://datasheet.octopart.com:443/USBLC6-2SC6Y-STMicroelectronics-datasheet-13733956.pdf?src-supplier=STMicroelectronics, ComponentLink2URL=https://datasheet.octopart.com:443/USBLC6-2SC6Y-STMicroelectronics-datasheet-13733956.pdf?src-supplier=STMicroelectronics, ComponentLink3Description=https://datasheet.octopart.com:443/USBLC6-2SC6Y-STMicroelectronics-datasheet-10412581.pdf?src-supplier=Factory+Futures, ComponentLink3URL=https://datasheet.octopart.com:443/USBLC6-2SC6Y-STMicroelectronics-datasheet-10412581.pdf?src-supplier=Factory+Futures, ComponentLink4Description=https://datasheet.octopart.com:443/USBLC6-2SC6Y-STMicroelectronics-datasheet-525477.pdf?src-supplier=Factory+Futures, ComponentLink4URL=https://datasheet.octopart.com:443/USBLC6-2SC6Y-STMicroelectronics-datasheet-525477.pdf?src-supplier=Factory+Futures, Country of Origin=Malaysia, Depth=1.75mm, Direction=Unidirectional, Element Configuration=Dual, ESD Protection=Yes, Export Control Classification Number (ECCN) Code=EAR99, Harmonized Tariff Schedule (HTS) Code=8541.10.00.50, Height=1.45mm, Lead Free="Lead Free", Length=3mm, Lifecycle Status=Production, Max Operating Temperature=150°C, Max Reverse Leakage Current=150nA, Min Breakdown Voltage=6V, Mount="Surface Mount", Number of Bidirectional Channels=2, Number of Channels=2, Number of Elements=1, Number of Pins=6, Number of Terminals=6, Packaging="Tape and Reel", Peak Reverse Current=150nA, Polarity=Unidirectional, Pricing 1="5=0,55, 50=0,357, 100=0,229, 500=0,159, 1500=0,144 (EUR)", Radiation Hardening=No, REACH SVHC=Yes, RoHS=Compliant, Schedule B="8536300000, 8536300000|8536300000|8536300000|8536300000|8536300000", Stock 1=231617, Supplier 1=Farnell, Supplier Part Number 1=USBLC6-2SC6Y, Termination=SMD/SMT, Width=1.75mm, Introduction Date=2012-05-16
U3: "LDO Regulator, 300 mA, Wide Vin, Ultra-Low Iq Fixed 3.3V, Non-Active Discharge, TSOT23-5", Case/Package=VSSOP, Dropout Voltage=275mV, Manufacturer=onsemi, Manufacturer Lifecycle Status=ACTIVE, Manufacturer Part Number=NCP718BSN330T1G, Max Junction Temperature (Tj)=125°C, Max Operating Temperature=150°C, Max Supply Voltage=24V, Min Supply Voltage=4.3V, Output Current=300mA, Output Voltage=3.3V, Ratings=AEC-Q100, Voltage Tolerance=2%, Accuracy=2%, Category="LDO Voltage Regulators", China RoHS=Compliant, ComponentLink1Description=https://datasheet.octopart.com:443/NCP718BSN330T1G-onsemi-datasheet-180965627.pdf?src-supplier=IHS, ComponentLink1URL=https://datasheet.octopart.com:443/NCP718BSN330T1G-onsemi-datasheet-180965627.pdf?src-supplier=IHS, ComponentLink2Description=https://datasheet.octopart.com:443/NCP718BSN330T1G-onsemi-datasheet-156001541.pdf?src-supplier=Upverter, ComponentLink2URL=https://datasheet.octopart.com:443/NCP718BSN330T1G-onsemi-datasheet-156001541.pdf?src-supplier=Upverter, ComponentLink3Description=https://sigma.octopart.com:443/138897405/technical_drawing/onsemi-NCP718BSN330T1G.pdf?src-supplier=Upverter, ComponentLink3URL=https://sigma.octopart.com:443/138897405/technical_drawing/onsemi-NCP718BSN330T1G.pdf?src-supplier=Upverter, ComponentLink4Description=https://datasheet.octopart.com:443/NCP718BSN330T1G-ON-Semiconductor-datasheet-118180658.pdf?src-supplier=JRH+Electronics, ComponentLink4URL=https://datasheet.octopart.com:443/NCP718BSN330T1G-ON-Semiconductor-datasheet-118180658.pdf?src-supplier=JRH+Electronics, ComponentLink5Description=https://datasheet.octopart.com:443/NCP718BSN330T1G-ON-Semiconductor-datasheet-95952869.pdf?src-supplier=onsemi, ComponentLink5URL=https://datasheet.octopart.com:443/NCP718BSN330T1G-ON-Semiconductor-datasheet-95952869.pdf?src-supplier=onsemi, ComponentLink6Description=https://datasheet.octopart.com:443/NCP718BSN330T1G-onsemi-datasheet-164417801.pdf?src-supplier=Augswan, ComponentLink6URL=https://datasheet.octopart.com:443/NCP718BSN330T1G-onsemi-datasheet-164417801.pdf?src-supplier=Augswan, ComponentLink7Description=http://sigma.octopart.com:80/150624081/rohs_statement/ON-Semiconductor-NCP718BSN330T1G.pdf?src-supplier=Compliance+Statements, ComponentLink7URL=http://sigma.octopart.com:80/150624081/rohs_statement/ON-Semiconductor-NCP718BSN330T1G.pdf?src-supplier=Compliance+Statements, ComponentLink8Description=http://sigma.octopart.com:80/reach_statement/ON-Semiconductor-company-79.pdf?src-supplier=Compliance+Statements, ComponentLink8URL=http://sigma.octopart.com:80/reach_statement/ON-Semiconductor-company-79.pdf?src-supplier=Compliance+Statements, ComponentLink9Description=https://octopart.com:443/opatz8j6/c1?t=z0SjjS1aZyVj4hpX5vVj4wbC0E02yp2xM3JkvAzJKOInFKFpeuivvTlCOb44YSB_HKOUzbSm5ZS-EO9i1oqjg_lFqOk22wfTUy00ns7o_dknGn8FeV5USBBxFGRw-HQA70h7sfihBJ0obPcno1c5MP7AQFcY6h-XVFqwkwKB8w-wluEaVgjruRbUGw6_10_64SdzVoZaT4mdtG7Ewmjt3QQ5f64pf7sY3DgnQ06z3evh7Zx0yROl8ZIBx1im_ijXmyvVwDVc7g9HRrpWRP_ZIurhPRr0SB5rLwmMN7I3dtpSCFuDCKdBEa2Sh4HE3nCoFJYsDyuHnkzlbF09PJh8r8Grw61lDJrTfryr1p7hhJJgYQ&src-supplier=Compliance+Statements, ComponentLink9URL=https://octopart.com:443/opatz8j6/c1?t=z0SjjS1aZyVj4hpX5vVj4wbC0E02yp2xM3JkvAzJKOInFKFpeuivvTlCOb44YSB_HKOUzbSm5ZS-EO9i1oqjg_lFqOk22wfTUy00ns7o_dknGn8FeV5USBBxFGRw-HQA70h7sfihBJ0obPcno1c5MP7AQFcY6h-XVFqwkwKB8w-wluEaVgjruRbUGw6_10_64SdzVoZaT4mdtG7Ewmjt3QQ5f64pf7sY3DgnQ06z3evh7Zx0yROl8ZIBx1im_ijXmyvVwDVc7g9HRrpWRP_ZIurhPRr0SB5rLwmMN7I3dtpSCFuDCKdBEa2Sh4HE3nCoFJYsDyuHnkzlbF09PJh8r8Grw61lDJrTfryr1p7hhJJgYQ&src-supplier=Compliance+Statements, ComponentLink10Description=https://octopart.com:443/opatz8j6/c1?t=n9LQeOBviOVt4kI1beH1kC99kMfogPmC3oJBY2_7J-qhsq_Sp3Wd4K0G5iKivtvP0hTRjiwjpdacUo52MmvmaiUjm2lC83lbfXHZ4vyOU8RAwSlZ1tO2nlHrBdZSlhn4XIN10GanEOx3WYyPD-AUpl9U84o6ZMlprjsJE3UgGegXGKGosoFjibu6V0XOw7HShO_QH5HjzxUHL8dp3lwnNNSwTlKUenOoGNv54LAI_k1R-11UrqOBV4m18JP99C5DzNJGF65TSwqjJu1kfHp2QOnMAdqtHXFEOUlK05g5lqN8wOQflCAR6PT57CAt8c5PneSQN_gPksI66eRt8GquPz-s16dthuO-sfir3BDjmCfQ7hY&src-supplier=Compliance+Statements, ComponentLink10URL=https://octopart.com:443/opatz8j6/c1?t=n9LQeOBviOVt4kI1beH1kC99kMfogPmC3oJBY2_7J-qhsq_Sp3Wd4K0G5iKivtvP0hTRjiwjpdacUo52MmvmaiUjm2lC83lbfXHZ4vyOU8RAwSlZ1tO2nlHrBdZSlhn4XIN10GanEOx3WYyPD-AUpl9U84o6ZMlprjsJE3UgGegXGKGosoFjibu6V0XOw7HShO_QH5HjzxUHL8dp3lwnNNSwTlKUenOoGNv54LAI_k1R-11UrqOBV4m18JP99C5DzNJGF65TSwqjJu1kfHp2QOnMAdqtHXFEOUlK05g5lqN8wOQflCAR6PT57CAt8c5PneSQN_gPksI66eRt8GquPz-s16dthuO-sfir3BDjmCfQ7hY&src-supplier=Compliance+Statements, Country of Origin=Thailand, Export Control Classification Number (ECCN) Code=EAR99, Harmonized Tariff Schedule (HTS) Code=8542.39.00.60, Height=1mm, Height - Seated (Max)=1mm, Length=2.9mm, Lifecycle Status=Production, Max Input Voltage=24V, Min Input Voltage=4.3V, Number of Channels=1, Number of Circuits=1, Number of Outputs=1, Number of Terminals=5, Output Type=Fixed, Pricing 1="3000=0,197 (EUR)", REACH SVHC=Yes, RoHS=Compliant, Schedule B="8542390000, 8542390000|8542390000|8542390000|8542390000|8542390000", Stock 1=12771, Supplier 1=Farnell, Supplier Part Number 1=NCP718BSN330T1G, Terminal Pitch=950µm, Width=1.6mm, Introduction Date=2018-03-21
U4: "MP1584 Series 28 V 3 A 1.5 MHz SMT Step-Down Converter - SOIC-8E", Ambient Temperature Range High=85°C, Case/Package=SOIC, Manufacturer="Monolithic Power Systems", Manufacturer Lifecycle Status=NRFND, Manufacturer Part Number=MP1584EN-LF-Z, Max Junction Temperature (Tj)=125°C, Max Output Current=3A, Max Output Voltage=25V, Max Power Dissipation=2.5W, Max Supply Voltage=28V, Max Switching Frequency=1.5MHz, Min Operating Temperature=-20°C, Min Output Voltage=800mV, Min Supply Voltage=4.5V, Nominal Output Voltage=3.3V, Nominal Supply Current=100µA, Nominal Input Voltage=12V, Category="Voltage Regulators - Switching", ComponentLink1Description=https://datasheet.octopart.com:443/MP1584EN-LF-Z-Monolithic-Power-Systems-datasheet-155981995.pdf?src-supplier=Monolithic+Power+Systems, ComponentLink1URL=https://datasheet.octopart.com:443/MP1584EN-LF-Z-Monolithic-Power-Systems-datasheet-155981995.pdf?src-supplier=Monolithic+Power+Systems, ComponentLink2Description=https://datasheet.octopart.com:443/MP1584EN-LF-Z-Monolithic-Power-Systems-datasheet-180786201.pdf?src-supplier=IHS, ComponentLink2URL=https://datasheet.octopart.com:443/MP1584EN-LF-Z-Monolithic-Power-Systems-datasheet-180786201.pdf?src-supplier=IHS, ComponentLink3Description=https://datasheet.octopart.com:443/MP1584EN-LF-Z-Monolithic-Power-Systems-datasheet-138896877.pdf?src-supplier=Upverter, ComponentLink3URL=https://datasheet.octopart.com:443/MP1584EN-LF-Z-Monolithic-Power-Systems-datasheet-138896877.pdf?src-supplier=Upverter, ComponentLink4Description=https://datasheet.octopart.com:443/MP1584EN-LF-Z-Monolithic-Power-Systems-datasheet-28355791.pdf?src-supplier=Augswan, ComponentLink4URL=https://datasheet.octopart.com:443/MP1584EN-LF-Z-Monolithic-Power-Systems-datasheet-28355791.pdf?src-supplier=Augswan, ComponentLink5Description=https://datasheet.octopart.com:443/MP1584EN-LF-Z-Monolithic-Power-Systems-datasheet-157246321.pdf?src-supplier=LKR, ComponentLink5URL=https://datasheet.octopart.com:443/MP1584EN-LF-Z-Monolithic-Power-Systems-datasheet-157246321.pdf?src-supplier=LKR, ComponentLink6Description=https://datasheet.octopart.com:443/MP1584EN-LF-Z-Monolithic-Power-Systems-datasheet-130112029.pdf?src-supplier=TME, ComponentLink6URL=https://datasheet.octopart.com:443/MP1584EN-LF-Z-Monolithic-Power-Systems-datasheet-130112029.pdf?src-supplier=TME, ComponentLink7Description=https://datasheet.octopart.com:443/MP1584EN-LF-Z-Monolithic-Power-Systems-datasheet-26504489.pdf?src-supplier=Future+Electronics, ComponentLink7URL=https://datasheet.octopart.com:443/MP1584EN-LF-Z-Monolithic-Power-Systems-datasheet-26504489.pdf?src-supplier=Future+Electronics, Contact Plating=Tin, Height=1.7mm, Height - Seated (Max)=1.7mm, Lead Free="Lead Free", Length=4.9mm, Lifecycle Status=NRND, Max Operating Temperature=85°C, Max Input Voltage=28V, Min Input Voltage=4.5V, Mount="Surface Mount", Number of Channels=1, Number of Circuits=1, Number of Outputs=1, Number of Pins=8, Number of Terminals=8, Operating Supply Voltage=28V, Output Configuration=Positive, Output Current=3A, Output Type=Adjustable, Output Voltage=25V, Pricing 1="2500=1,27 (USD)", REACH SVHC=Yes, RoHS=Compliant, Supplier 1="Future Electronics", Supplier Info=MP1584EN, Switching Frequency=1.5MHz, Synchronous Rectifier=No, Terminal Pitch=1.27mm, Topology=Buck, Width=3.9mm